# EAGLE board MainBoardGerber (EAGLE 7.7.0)
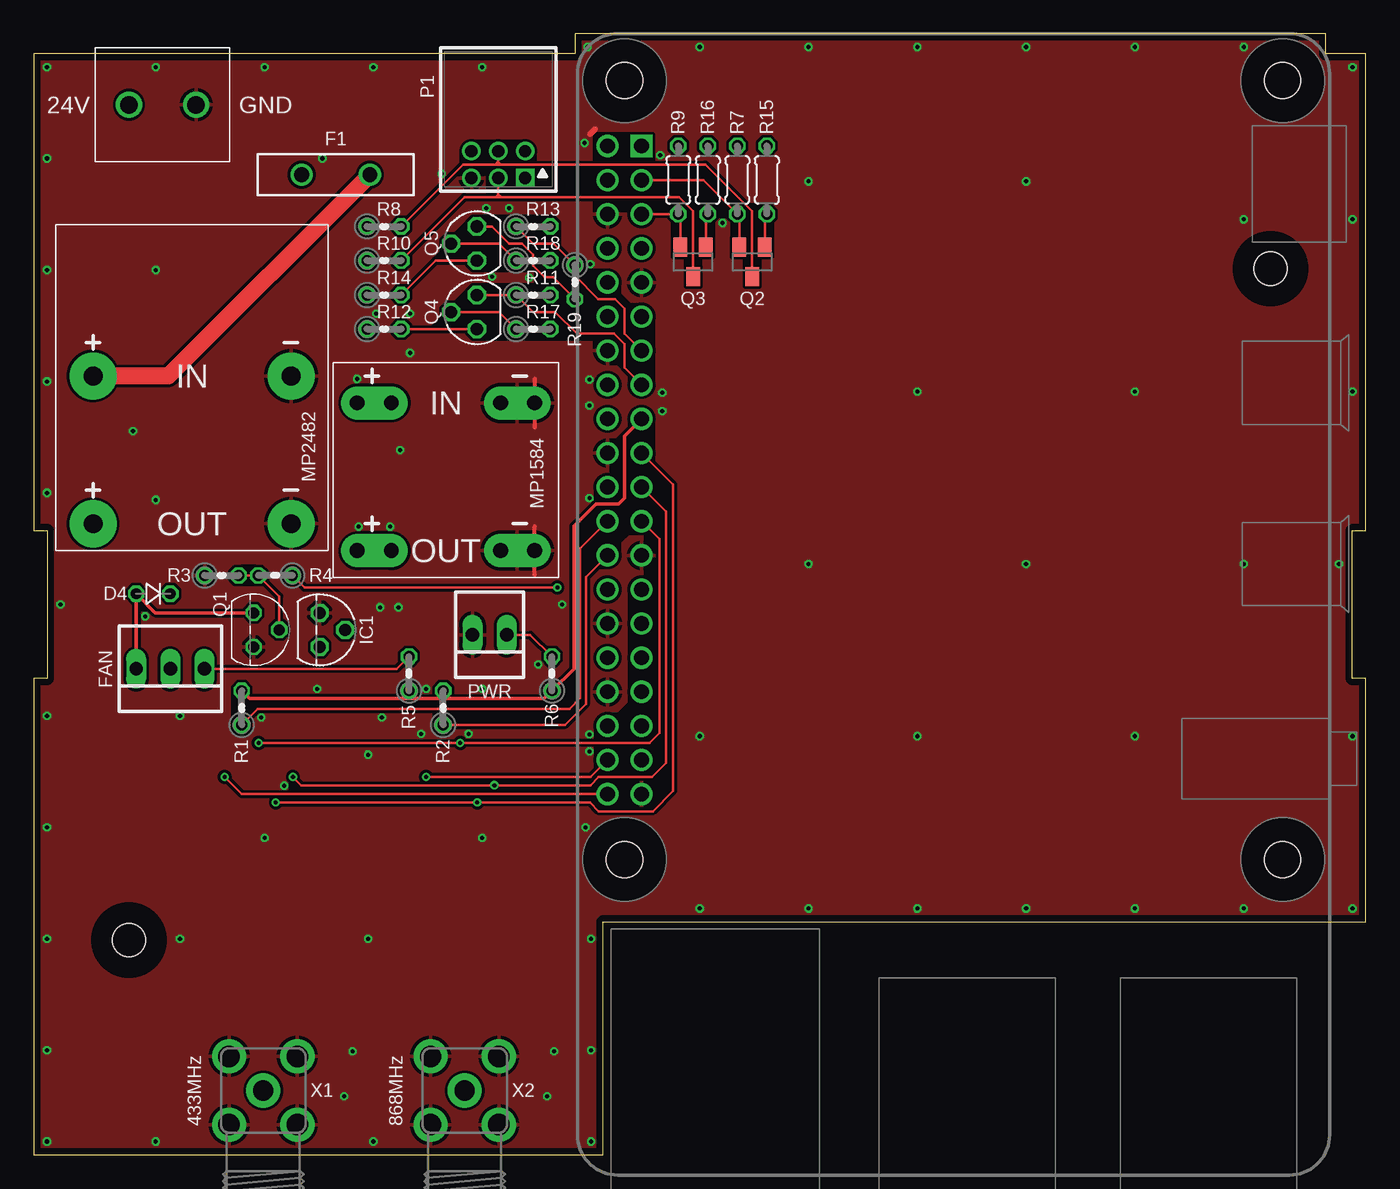
[diagram p0: board, top side]
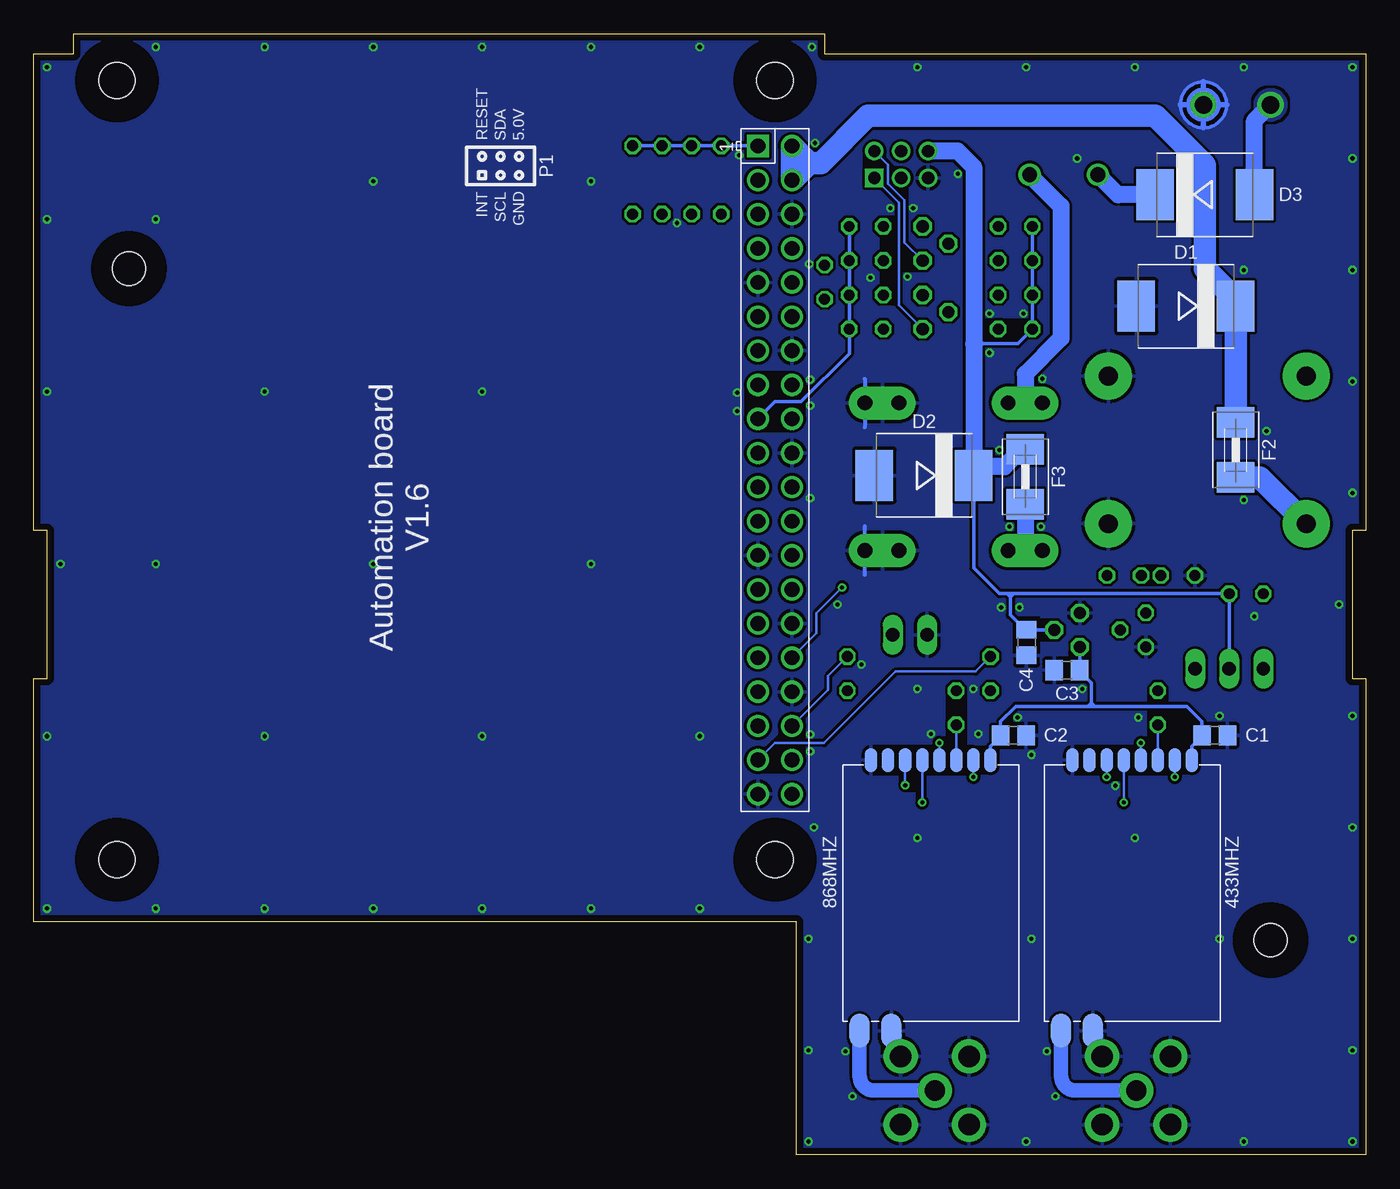
[diagram p1: board, bottom side, seen from below]

Size 99.2 x 83.5 mm. Coordinates in mm from the lower left corner, seen from the top.
Outline: 0,0 42.4,0 42.4,17.35 99.2,17.35 99.2,35.5 98.2,35.5 98.2,46.5 99.2,46.5 99.2,82 96.2,82 96.2,83.5 40.3,83.5 40.3,82 0,82 0,46.5 1,46.5 1,35.5 0,35.5 0,0
Copper layers (1*16): Top 0.035mm / dielectric 1.6mm / Bottom 0.035mm
Design rules "Elecrow *": minimum track width 6mil, minimum drill 12mil, track to track 6mil, track to pad 6mil, pad to pad 12mil, via to via 12mil, smd to smd 0mil, copper to edge 20mil, drill to drill 10mil, minimum pad ring 6mil, minimum via ring 6mil, stop-mask expansion 0mil, vias tented up to drill 100mil, thermal gap 10mil
Net classes: 0 default: clearance 0.205 mm
Holes 2.5 mm at 7.1,16 92.1,66
tRestrict: area 40.9,76.9 to 47.1,83.1; area 89.9,76.9 to 96.1,83.1; area 89.9,18.9 to 96.1,25.1; area 40.9,18.9 to 47.1,25.1; area 89.3,63.2 to 94.9,68.8; area 4.3,13.2 to 9.9,18.8; area 43.9,26.3 to 46.5,27.5; area 41.7,70.2 to 46.1,76.2; area 33.7,71.5 to 34.5,74; area 42.9,58.8 to 45.5,60.1; area 42.9,46.2 to 45.5,53.3; area 41.7,60 to 43,61.5; 57 lines
bRestrict: area 4.3,13.2 to 9.9,18.8; area 89.3,63.2 to 94.9,68.8; area 40.9,76.9 to 47.1,83.1; area 89.9,76.9 to 96.1,83.1; area 40.9,18.9 to 47.1,25.1; area 89.9,18.9 to 96.1,25.1; area 14.2,28.3 to 21.7,30.5; area 29.2,28.3 to 36.7,30.5; area 25.5,30.2 to 27.5,32.3; area 10.5,30.2 to 13.7,32.3; area 10.6,76.7 to 13.6,79.7; area 21,35.1 to 23,37.1; 5 more areas; 52 lines

## Footprints (pad centres in the part's own frame; a part is rotated, then mirrored left to right if it is on the bottom)
691131710002 = drill 1.3: 1 -2.5,0; 2 2.5,0
E07-M1101S-SMD = smd 2.54 x 1.499: ANT 10.25,-5.295; GND1 10.25,-2.945 | smd 1.778 x 0.914: CSN -9.9,1.905; GDO0 -9.9,3.175; GDO2 -9.9,-3.175; GND0 -9.9,-4.445; SCLK -9.9,0.635; SI -9.9,-0.635; SO -9.9,-1.905; VCC -9.9,4.445
C0805 = smd 1.3 x 1.5: 1 -0.95,0; 2 0.95,0
SMC = smd 2.8 x 3.8: A 3.7,0; C -3.7,0
DO35-2V = drill 0.813 octagon: A 1.27,0; C -1.27,0
PTH_11MM = drill 1.1: P$1 -2.54,0; P$2 2.54,0
1812 = smd 2.286 x 2.794: 1 -2.046,0; 2 2.046,0
22-23-2031 = drill 1 long: 1 -2.54,0; 2 0,0; 3 2.54,0
TO92 = drill 0.9 octagon: 1 -1.27,0; 2 0,1.905; 3 1.27,0
MP1584V = drill 1.1 pad 2.5 offset: IN+0 -2,-4.064; IN-0 -2,4.064; OUT+0 9,-4.064; OUT-0 9,4.064 | drill 1.1: IN+1 -2,-6.604; IN-1 -2,6.604; OUT+1 9,-6.604; OUT-1 9,6.604
MP2482V = drill 1.4 pad 3.5: IN+ -2,-7.366; IN- -2,7.366; OUT+ 9,-7.366; OUT- 9,7.366
DF11-06DP-2DS = drill 0.914 square: 1 2,-1 | drill 0.914: 2 2,1; 3 0,-1; 4 0,1; 5 -2,-1; 6 -2,1
22-23-2021 = drill 1 long: 1 -1.27,0; 2 1.27,0
TO92' = drill 0.813 octagon: 1 1.27,0; 2 0,1.905; 3 -1.27,0
SOT23 = smd 1 x 1.4: 1 -0.95,-1.1; 2 0.95,-1.1; 3 0,1.1
SOT54E = drill 0.9 octagon: D -1.27,0; G 0,1.905; S 1.27,0
0204V = drill 0.813 octagon: 1 -1.27,0; 2 1.27,0
0204/5 = drill 0.813 octagon: 1 -2.54,0; 2 2.54,0
RASPI_4_BOARD_B+_FULL = drill 1.1 square: 1 8.37,51.23 | drill 1.1: 2 8.37,53.77; 3 10.91,51.23; 4 10.91,53.77; 5 13.45,51.23; 6 13.45,53.77; 7 15.99,51.23; 8 15.99,53.77; 9 18.53,51.23; 10 18.53,53.77; 11 21.07,51.23; 12 21.07,53.77; 13 23.61,51.23; 14 23.61,53.77; 15 26.15,51.23; 16 26.15,53.77; 17 28.69,51.23; 18 28.69,53.77; 19 31.23,51.23; 20 31.23,53.77; 21 33.77,51.23; 22 33.77,53.77; 23 36.31,51.23; 24 36.31,53.77; 25 38.85,51.23; 26 38.85,53.77; 27 41.39,51.23; 28 41.39,53.77; 29 43.93,51.23; 30 43.93,53.77; 31 46.47,51.23; 32 46.47,53.77; 33 49.01,51.23; 34 49.01,53.77; 35 51.55,51.23; 36 51.55,53.77; 37 54.09,51.23; 38 54.09,53.77; 39 56.63,51.23; 40 56.63,53.77 | hole 2.7: 3.5,3.5; 3.5,52.5; 61.5,3.5; 61.5,52.5
SMA90_DIP = drill 1.5 pad 2.54: ANTENNA 0,0 | drill 1.6 pad 2.54: GND1 -2.54,2.54; GND2 2.54,2.54; GND3 -2.54,-2.54; GND4 2.54,-2.54

## Placement (x,y rotation side)
24V  691131710002  [691131710002]  9.6,78.2 0 top
433MHZ  CC1101E07-SMD  [E07-M1101S-SMD]  17.4,19.5 270 bottom
868MHZ  CC1101E07-SMD  [E07-M1101S-SMD]  32.4,19.5 270 bottom
C1  100nF  [C0805]  11.26,31.25 0 bottom
C2  100nF  [C0805]  26.25,31.25 0 bottom
C3  1uF  [C0805]  22.25,36.1 180 bottom
C4  1uF  [C0805]  25.27,38.15 90 bottom
D1  1N5908SMC  [SMC]  13.4,63.2 180 bottom
D2  1N5908SMC  [SMC]  32.9,50.6 180 bottom
D3  MURS320  [SMC]  12,71.5 0 bottom
D4  1N4148  [DO35-2V]  8.91,41.79 180 top
F1  1.5A  [PTH_11MM]  22.5,73 180 top
F2  5V/3.5A  [1812]  9.7,52.5 270 bottom
F3  5V/2.5A  [1812]  25.37,50.5 90 bottom
FAN  22-23-2031  [22-23-2031]  10.18,36.2 180 top
IC1  3.3V  [TO92]  21.3,39.1 270 top
MP1584  DC-DC-STEP-DOWN  [MP1584V]  30.7,54 270 top
MP2482  DC-DC-STEP-DOWN  [MP2482V]  11.8,56 270 top
P1  DF11-06-2DS  [DF11-06DP-2DS]  34.6,73.75 0 top
PWR  22-23-2021  [22-23-2021]  33.95,38.73 180 top
Q1  BC337-40  [TO92']  16.39,39.1 270 top
Q2  BSS138  [SOT23]  53.5,66.5 180 top
Q3  BSS138  [SOT23]  49.1,66.5 180 top
Q4  BS170  [SOT54E]  33,62.77 90 top
Q5  BS170  [SOT54E]  33,67.87 90 top
R1  10K  [0204V]  15.49,33.3 90 top
R2  10K  [0204V]  30.5,33.3 90 top
R3  10K  [0204V]  14,43.15 0 top
R4  1K8  [0204V]  18,43.15 180 top
R5  10K  [0204V]  27.95,35.84 90 top
R6  10K  [0204V]  38.6,35.84 90 top
R7  1K  [0204/5]  52.4,72.6 90 top
R8  1K  [0204V]  26.1,69.14 0 top
R9  1K  [0204/5]  48,72.6 90 top
R10  1K  [0204V]  26.1,66.6 0 top
R11  10K  [0204V]  37.2,64.04 0 top
R12  10K  [0204V]  26.1,61.5 0 top
R13  10K  [0204V]  37.2,69.14 0 top
R14  10K  [0204V]  26.1,64.04 0 top
R15  100R  [0204/5]  54.6,72.6 90 top
R16  100R  [0204/5]  50.2,72.6 90 top
R17  100R  [0204V]  37.2,61.5 0 top
R18  100R  [0204V]  37.2,66.6 0 top
R19  680R  [0204V]  40.3,65 270 top
RPI  RASPI_BOARD_B+#_4F  [RASPI_4_BOARD_B+_FULL]  96.5,83.5 270 bottom
X1  [SMA90_DIP]  17.1,4.8 180 top
X2  [SMA90_DIP]  32.1,4.8 180 top

## Library data of the parts
24V = con-wuerth
433MHZ 868MHZ MP1584 MP2482 = modules
C1-C4 = rcl
D1-D4 = diode
F1 = ptc
F2 F3 X1 X2 = adafruit
FAN = con-molex; MF: MOLEX; MPN: 22-23-2031; OC_FARNELL: 1462950; OC_NEWARK: 30C0862
IC1 = mcp
P1 = con-hirose-df11
PWR = con-molex; MF: MOLEX; MPN: 22-23-2021; OC_FARNELL: 1462926; OC_NEWARK: 25C3832
Q1 = transistor-npn
Q2-Q5 = transistor-small-signal
R1-R19 = rcl; OC_FARNELL: unknown
RPI = raspberrypi

## Nets
3V3: R1.2 R2.2 R5.1 R6.1 R7.2 R9.2 R11.2 R13.2 R15.2 R16.2 R17.2 R18.2 RPI.1 RPI.17
5V0: D1.C F2.1 RPI.2 RPI.4
+3V3: 433MHZ.VCC 868MHZ.VCC C1.1 C2.1 C3.1 IC1.3
+5V: C4.2 D2.C D4.C F3.2 FAN.2 IC1.2 P1.6 R8.1 R10.1 R12.1 R14.1
+24V: 24V.1 D3.A
GND: 24V.2 433MHZ.GND0 433MHZ.GND1 868MHZ.GND0 868MHZ.GND1 C1.2 C2.2 C3.2 C4.1 D1.A D2.A IC1.1 MP1584.IN-0 MP1584.IN-1 MP1584.OUT-0 MP1584.OUT-1 MP2482.IN- MP2482.OUT- P1.5 PWR.2 Q1.1 R3.1 RPI.6 RPI.9 RPI.14 RPI.20 RPI.25 RPI.30 RPI.34 RPI.39 X1.GND1 X1.GND2 X1.GND3 X1.GND4 X2.GND1 X2.GND2 X2.GND3 X2.GND4
INT: Q4.S R11.1 RPI.15
N$1: P1.3 Q3.3 R10.2
N$3: 433MHZ.CSN R1.1 RPI.24
N$4: F2.2 MP2482.OUT+
N$5: Q5.S R19.2
N$6: F3.1 MP1584.OUT+0 MP1584.OUT+1
N$7: F1.P$1 MP1584.IN+0 MP1584.IN+1 MP2482.IN+
N$8: 433MHZ.ANT X1.ANTENNA
N$9: D3.C F1.P$2
N$10: 433MHZ.GDO0 RPI.40
N$11: Q1.2 R3.2 R4.2
N$12: P1.4 Q2.3 R8.2
N$13: R4.1 RPI.32
N$14: D4.A FAN.3 Q1.3
N$15: 868MHZ.CSN R2.1 RPI.26
N$16: 433MHZ.SCLK 868MHZ.SCLK RPI.23
N$17: 433MHZ.SO 868MHZ.SO RPI.21
N$18: 433MHZ.SI 868MHZ.SI RPI.19
N$19: 868MHZ.GDO0 RPI.38
N$20: 868MHZ.ANT X2.ANTENNA
N$21: PWR.1 R6.2 RPI.36
N$22: FAN.1 R5.2 RPI.37
N$23: Q2.1 R15.1
N$24: Q3.1 R16.1
N$25: P1.1 Q4.D R12.2
N$26: P1.2 Q5.D R14.2
N$27: Q5.G R18.1
N$28: Q4.G R17.1
RESET: R13.1 R19.1 RPI.13
SCL: Q3.2 R9.1 RPI.5
SDA: Q2.2 R7.1 RPI.3

## Tracks (layer width: path | path; a pad name or v marks a point on that pad's centre or on a via)
3V3
  Top 0.254: RPI.17 44,53.54 44,48.91 43.55,48.46 41.86,48.46 40.23,46.83 40.23,36.2 R6.1 38.02,33.99 30.5,33.99 | R2.2 30.5,33.99 | 27.95,33.99 30.5,33.99 | R5.1 27.95,33.99 | 27.95,33.99 16.08,33.99 R1.2
  Bottom 0.254: R18.2 R13.2 R11.2 R17.2 38.47,59.66 42.05,56.08 44,56.08 RPI.17 | RPI.1 R9.2 R16.2 R7.2 R15.2
5V0
  Bottom 1.676: F2.1 D1.C 9.7,63.7 12,66 12,73.7 15.68,77.38 37.06,77.38 40.58,73.86 41.46,73.86 | 41.46,73.86 RPI.4 RPI.2 41.46,73.86
+3V3
  Bottom 0.254: IC1.3 C3.1 21.3,36 20.45,35.15 20.45,33.65 | 20.2,33.4 20.7,33.4 | 20.45,33.65 20.7,33.4 | 20.45,33.65 20.2,33.4 | 20.2,33.4 13.34,33.4 12.21,32.27 C1.1 12.21,31.16 12.96,30.41 433MHZ.VCC | 868MHZ.VCC 27.95,30.41 27.2,31.16 C2.1 27.2,32.27 26.07,33.4 20.7,33.4
+5V
  Bottom 0.254: IC1.2 C4.2 25.38,39.1 26.48,40.2 26.48,41.54 | FAN.2 D4.C 26.22,41.79 | R8.1 R10.1 R14.1 R12.1 25.93,60.4 28.5,60.4 | 26.22,41.79 26.73,41.79 | 28.5,60.4 29.04,60.4 | 29.04,60.4 29.2,60.4 | 26.48,41.54 26.22,41.79 | 26.48,41.54 26.73,41.79 | 26.73,41.79 27.28,41.79 29.2,43.71 D2.C | 28.5,60.4 28.77,60.67 28.79,60.67 29.04,60.42 29.04,60.4 | 28.5,60.4 28.77,60.13
  Bottom 1.27: P1.6 30.38,74.75 29.2,73.57 29.2,60.4 D2.C 29.2,51.05 29,51.25 26.9,51.25 25.6,52.55 F3.2
+24V
  Bottom 1.27: D3.A 8.3,77 24V.1
  pour Bottom (no thermals): 5.96,78.2 arc-180 8.24,78.2 arc-180
GND  (via drill 0.3)
  Top 0.305: 37.3,57.8 37.3,54.2 | 37.3,43.2 37.3,46.8
  Top 0.406: 41.43,76.01 41.81,76.39
  Bottom 0.254: 10.37,78.2 arc-90 12.1,79.92 arc-90 13.82,78.2 arc-90 12.1,76.48 arc-90 10.37,78.2
  Bottom 0.305: 37.3,57.8 37.3,54.2 | 37.3,43.2 37.3,46.8
  Bottom 0.406: 10.37,78.2 11.1,78.2 24V.2 | 24V.2 13.1,78.2 13.82,78.2 | 12.1,79.92 24V.2 | 24V.2 12.1,76.48
  Bottom 0.54: 11.1,78.2 arc-180 13.1,78.2 arc-180 11.1,78.2
  other vias: 1,1 1,7.8 1,16.1 1,24.4 1,32.7 2,41 1,49.3 1,57.6 1,65.9 1,74.2 1,81 9.1,1 9.1,48.78 9.1,65.9 9.1,81 10.9,16.1 17.2,81 25.3,1 24.9,16.1 17.2,23.6 25.3,81 33.4,23.6 33.4,81 41.5,1 41.5,7.8 41.5,16.1 41.1,24.4 41.38,48.91 41.25,82.5 49.6,18.35 49.6,82.5 57.7,18.35 65.8,31.18 57.7,44.01 57.7,82.5 65.8,18.35 65.8,56.84 65.8,82.5 73.9,18.35 82,31.18 73.9,44.01 73.9,82.5 82,18.35 82,56.84 82,82.5 90.1,18.35 90.1,44.01 90.1,69.67 90.1,82.5 98.2,18.35 98.2,31.18 97.2,44.01 98.2,56.84 98.2,69.67 98.2,81 21.5,74.2 24.2,46.78 8.3,40.11 41.38,30.05 24.9,29.8 39.35,41 28.02,62.65 25.5,62.65 28.02,59.73 49.6,31.18 41.38,57.73 28.85,31.36 10.9,32.7 26.54,46.78 7.4,53.9 34.14,65.4 36.9,65.32 38.75,7.71 38.23,4.36 23.75,7.71 23.12,4.36 27.16,40.78 25.79,40.78 73.9,72.5 57.7,72.5 41.38,55.81 46.81,55.4 46.81,56.76 41.02,75.36 30.37,73.06 24.08,57.79 27.28,52.5 18.66,27.5 33.4,34.71 32.38,31.36 21.11,34.71 25.93,32.58 37.57,36.53 16.95,32.58 41.38,31.32 35.41,70.51 33.71,70.51 51.3,69.4 46.66,74.44 29.23,34.71 41.45,66.34
  pour Bottom (rank 2): 0,83.5 99.2,83.5 99.2,1.5 arc-90 96.2,0 0,0
  pour Top: 0,83.5 99.2,83.5 99.2,0 0,0
INT
  Top 0.203: Q4.S R11.1 37.2,62.77 38.84,62.77 40.45,61.16 43.22,61.16 44,60.38 44,58.62 RPI.15
N$1
  Top 0.203: 34.4,71.32 32.09,71.32 R10.2 | 34.4,71.32 34.8,71.32 | 34.8,71.32 48.06,71.32 49.1,70.28 Q3.3 | 34.6,71.52 34.8,71.32 | P1.3 34.6,71.52 | 34.6,71.52 34.4,71.32
N$3
  Top 0.203: RPI.24 40.7,45.16 40.7,34.03 39.89,33.22 16.68,33.22 R1.1
  Bottom 0.203: R1.1 433MHZ.CSN
N$4
  Bottom 1.676: MP2482.OUT+ 7.89,50.45 F2.2
N$5
  Top 0.203: Q5.S 34.15,69.14 35.42,67.87 36.37,67.87 37.2,67.04 37.2,66.21 38.06,65.35 38.68,65.35 R19.2
N$6
  Bottom 1.27: F3.1 25.37,45.2 25.16,45 MP1584.OUT+1
N$7
  Top 1.27: F1.P$1 10.04,58 MP2482.IN+
  Bottom 1.27: F1.P$1 22.7,70.66 22.7,60.82 25.37,58.15 25.37,56.2 25.16,56 MP1584.IN+1
N$8
  Bottom 1.075: X1.ANTENNA 21.62,4.8 arc90 22.7,5.88 433MHZ.ANT
N$9
  Bottom 1.27: D3.C 18.46,71.5 F1.P$2
N$10  (via drill 0.3)
  Top 0.203: v14.22,28.15 15.51,26.87 RPI.40
  Bottom 0.203: 433MHZ.GDO0 v14.22,28.15
N$11
  Top 0.203: R3.2 R4.2 18.3,41.59 Q1.2
N$12
  Top 0.203: R8.2 31.98,73.75 34.4,73.75 | Q2.3 53.5,70.27 50.02,73.75 34.8,73.75 | 34.4,73.75 34.8,73.75 | 34.6,73.95 34.8,73.75 | P1.4 34.6,73.95 | 34.6,73.95 34.4,73.75
N$13  (via drill 0.3)
  Top 0.203: v39,42.25 20.17,42.25 R4.1
  Bottom 0.203: RPI.32 40.91,38.85 40.91,40.34 v39,42.25
N$14
  Top 0.254: FAN.3 D4.A 9.06,40.37 Q1.3
N$15
  Top 0.203: RPI.26 41.12,43.04 41.12,33.57 39.58,32.03 R2.1
  Bottom 0.203: 868MHZ.CSN R2.1
N$16  (via drill 0.3)
  Top 0.203: v16.77,30.68 v31.77,30.68 45.86,30.68 46.59,31.41 46.59,45.87 RPI.23
  Bottom 0.203: v31.77,30.68 868MHZ.SCLK | 433MHZ.SCLK v16.77,30.68
N$17  (via drill 0.3)
  Top 0.203: RPI.21 47.1,47.9 47.1,29.21 46.03,28.14 42.08,28.14 41.47,27.53 v34.3,27.53 19.93,27.53 v19.3,28.15
  Bottom 0.203: v34.3,27.53 868MHZ.SO | 433MHZ.SO v19.3,28.15
N$18  (via drill 0.3)
  Top 0.203: RPI.19 47.62,49.92 47.62,27.11 46.11,25.6 42.08,25.6 41.43,26.25 v33.03,26.25 v18.04,26.25
  Bottom 0.203: 868MHZ.SI v33.03,26.25 | 433MHZ.SI v18.04,26.25
N$19  (via drill 0.3)
  Top 0.203: v29.23,28.15 41.47,28.15 RPI.38
  Bottom 0.203: 868MHZ.GDO0 v29.23,28.15
N$20
  Bottom 1.075: X2.ANTENNA 36.62,4.8 arc90 37.7,5.88 868MHZ.ANT
N$21
  Top 0.203: PWR.1 36.98,38.73 R6.2
  Bottom 0.203: R6.2 40.05,35.66 40.05,34.63 RPI.36
N$22
  Top 0.203: FAN.1 27.04,36.2 R5.2
  Bottom 0.203: RPI.37 44,30.68 40.35,30.68 35.03,36 29.06,36 R5.2
N$23
  Top 0.203: R15.1 54.45,69.91 Q2.1
N$24
  Top 0.203: R16.1 50.05,69.91 Q3.1
N$25
  Top 0.203: R12.2 Q4.D
  Bottom 0.203: Q4.D 34.77,63.27 34.77,70.92 P1.1
N$26
  Top 0.203: R14.2 29.93,66.6 Q5.D
  Bottom 0.203: Q5.D 34.35,67.95 34.35,71.08 35.6,72.33 35.6,73.75 P1.2
N$27
  Top 0.203: Q5.G 34.66,67.87 R18.1
N$28
  Top 0.203: Q4.G 34.66,62.77 R17.1
RESET
  Top 0.203: RPI.13 44,61.16 44,63.01 43.28,63.73 42.03,63.73 40.3,65.46 R19.1 38.7,67.87 37.2,67.87 R13.1
SCL
  Top 0.203: RPI.5 R9.1 48.15,69.91 Q3.2
SDA
  Top 0.203: Q2.2 52.55,69.91 R7.1 49.87,72.59 RPI.3

## Text on the board
tNames: GND | 433MHz | 868MHz
bNames: 5.0V | SDA | RESET | P1 | GND | SCL | INT | Automation board / V1.6